# Altium PCB JacdacServoDual 23.PcbDoc (part 2 of 2)
Units mm, origin at the board's own origin, x right, y up, seen from the top; angles counter-clockwise.
Board outline 35 x 26.5 mm, 2 copper layers (Top Layer, Bottom Layer), stack 1.525 mm thick; 38 components, 30 nets, 124 pads, 24 vias.
Unrouted connection lines stored in the file: 10.
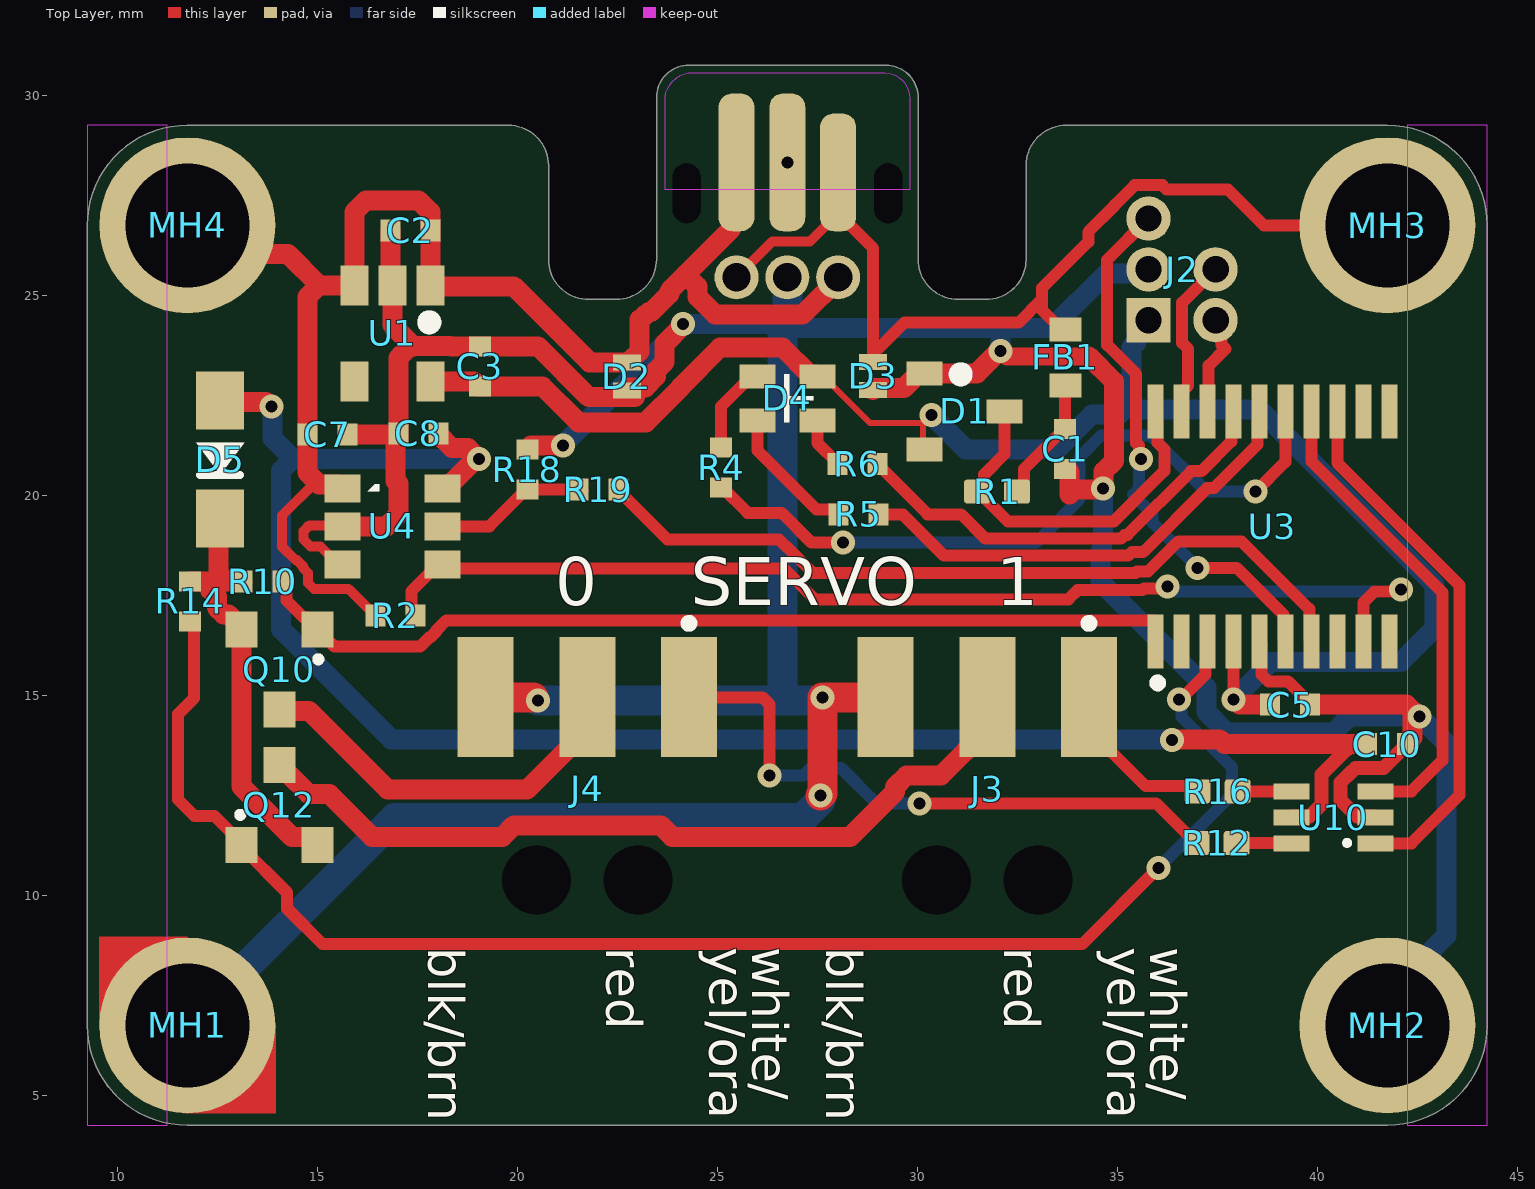
[diagram p0: Top Layer view]

## Silkscreen, mask and mechanical layers (free items; w line width, h text height) (continued)
Bottom Overlay: (continued)
  lines w0.1: 12.622,9.146 cw(c11.75,6.75) 13.158,8.876 cw(c13.858,8.869) 13.741,9.559 ; 12.622,24.354 ccw(c11.75,26.75) 13.158,24.624 ccw(c13.858,24.631) 13.741,23.941 ; 12.93,9.992 cw(c11.75,6.75) 13.739,9.569 ; 12.93,23.508 ccw(c11.75,26.75) 13.739,23.931 ; 14.146,7.622 ccw(c11.75,6.75) 13.876,8.158 ccw(c13.869,8.858) 14.559,8.741 ; 14.146,25.878 cw(c11.75,26.75) 13.876,25.342 cw(c13.869,24.642) 14.559,24.759 ; 14.569,8.739 cw(c11.75,6.75) 14.992,7.93 ; 14.569,24.761 ccw(c11.75,26.75) 14.992,25.57 ; 38.508,7.93 cw(c41.75,6.75) 38.931,8.739 ; 38.508,25.57 ccw(c41.75,26.75) 38.931,24.761 ; 38.941,8.741 ccw(c39.631,8.858) 39.624,8.158 ccw(c41.75,6.75) 39.354,7.622 ; 38.941,24.759 cw(c39.631,24.642) 39.624,25.342 cw(c41.75,26.75) 39.354,25.878 ; 39.759,9.559 cw(c39.642,8.869) 40.342,8.876 cw(c41.75,6.75) 40.878,9.146 ; 39.759,23.941 ccw(c39.642,24.631) 40.342,24.624 ccw(c41.75,26.75) 40.878,24.354 ; 39.761,9.569 cw(c41.75,6.75) 40.57,9.992 ; 39.761,23.931 ccw(c41.75,26.75) 40.57,23.508
  lines w0.17: 39.196,24.34 39.196,24.64 ; 39.496,24.64 39.196,24.64 ; 39.62,24.216 39.196,24.64 ; 39.672,25.064 40.096,24.64 ; 39.796,24.64 40.096,24.64 ; 40.096,24.94 40.096,24.64
  lines w1: 12.776,9.569 cw(c11.75,6.75) 12.898,9.522 ; 12.776,23.931 ccw(c11.75,26.75) 12.898,23.978 ; 14.522,7.898 cw(c11.75,6.75) 14.569,7.776 ; 14.522,25.602 ccw(c11.75,26.75) 14.569,25.724 ; 38.931,7.776 cw(c41.75,6.75) 38.978,7.898 ; 38.931,25.724 ccw(c41.75,26.75) 38.978,25.602 ; 40.602,9.522 cw(c41.75,6.75) 40.724,9.569 ; 40.602,23.978 ccw(c41.75,26.75) 40.724,23.931
  text "Bottom Overlay" at 44,38.45 h1.7
  text "+" at 13.793,25.342 h2.5 r225
  text "-" at 13.145,8.646 h3.2 r315
  text "-" at 39.854,8.145 h3.2 r45
  text "Dual Servo" at 37.25,7.15 h1
  text "'.ProjectCodenameID'-'.ProjectRevision'" at 36.995,5.525 h1
Top Paste:
  text "Top Paste" at 44.001,37.043 h1.7
Bottom Paste:
  text "Bottom Paste" at 44,35.565 h1.7
Top Solder:
  text "Top Solder (resist)" at 44.001,34.243 h1.7
Bottom Solder:
  text "Bottom Solder (resist)" at 44,32.752 h1.7
Dimension:
  lines w0.15: 13.557,23.65 40.2,23.65
Fabrication notes:
  lines w0.1: 8.25,25.672 52.725,25.677 ; 24.275,29.429 24.875,30.029 30.27,30.029 ; 29.545,29.304 30.27,30.029 ; 39.319,19.66 42.622,16.357 48.4,16.357 ; 50.07,30.029 34.9,30.029 30.27,30.029 ; 51.725,28.315 52.075,28.665 ; 52.075,25.686 52.075,28.665 ; 52.425,28.315 52.075,28.665
  text "Fabrication Notes" at 44,45.465 h1.7
  text "non-plated slots x2" at 39.676,30.593 h1.7
  text "no board edge pips/ / rat's teeth/mouse bites  / above this line - make  / sure board edge is clean" at 53.15,25.151 h1.7
  text "place any PCB manufacturer identifiers / in this region on top layer,  / so they will be underneath the 20-TSSOP" at 48.475,13.782 h1.7
Board Cutout:
  text "Board Cutout" at 56.5,44 h1.7
Board Outline:
  lines w0.2: 11.744,29.25 19.78,29.25 cw(c19.78,28.25) 20.78,28.25 20.78,25.898 ccw(c21.78,25.898) 21.78,24.898 ; 11.75,29.25 ccw(c11.75,26.75) 9.25,26.75 9.25,6.75 ccw(c11.75,6.75) 11.75,4.25 41.75,4.25 ccw(c41.75,6.75) 44.25,6.75 44.25,26.746 ; 21.78,24.9 22.51,24.9 ; 22.48,24.9 ccw(c22.48,25.9) 23.48,25.9 ; 23.48,25.898 23.48,29.948 ; 23.48,29.95 cw(c24.28,29.95) 24.28,30.75 29.22,30.75 cw(c29.22,29.95) 30.02,29.95 30.02,25.9 ccw(c31.02,25.9) 31.02,24.9 31.72,24.9 ; 31.72,24.898 ccw(c31.72,25.898) 32.72,25.898 32.72,28.25 cw(c33.72,28.25) 33.72,29.25 41.744,29.25 ; 41.75,29.25 cw(c41.75,26.75) 44.25,26.75
  text "Board Outline" at 44,44.165 h1.7
Top Assy:
  text "Top Assy" at 44.001,42.85 h1.7
Bottom Assy:
  text "Bottom Assy" at 44,41.45 h1.7

## Dimensions
11.744,29.25 to 11.75,4.25 on Dimension
11.75,26.75 to 11.75,6.75 on Dimension
8.25,26.756 to 44.25,26.746 on Dimension
19.78,29.25 to 24.28,30.75 on Dimension
20.78,26.898 to 23.48,26.898 on Dimension
23.48,30.948 to 30.02,30.95 on Dimension
11.75,26.75 to 41.75,26.75 on Dimension

## Text inside footprints (layer, text, board x,y; h text height)
J1: Alignment "board outline  / for 'outie'" at 21.764,30.27 h1.2; Alignment "board outline  / for 'innie'" at 21.764,30.75 h1.2; Mechanical 9 "Jacdac / cable connector  / body" at 31.571,34.908 h1.7